# Altium PCB Voiture.PcbDoc (part 2 of 2)
Units mm, origin at the board's own origin, x right, y up, seen from the top; angles counter-clockwise.
Board outline 152.4 x 101.6 mm, 2 copper layers (Top Layer, Bottom Layer); 202 components, 170 nets, 599 pads, 88 vias.
Unrouted connection lines stored in the file: 12.
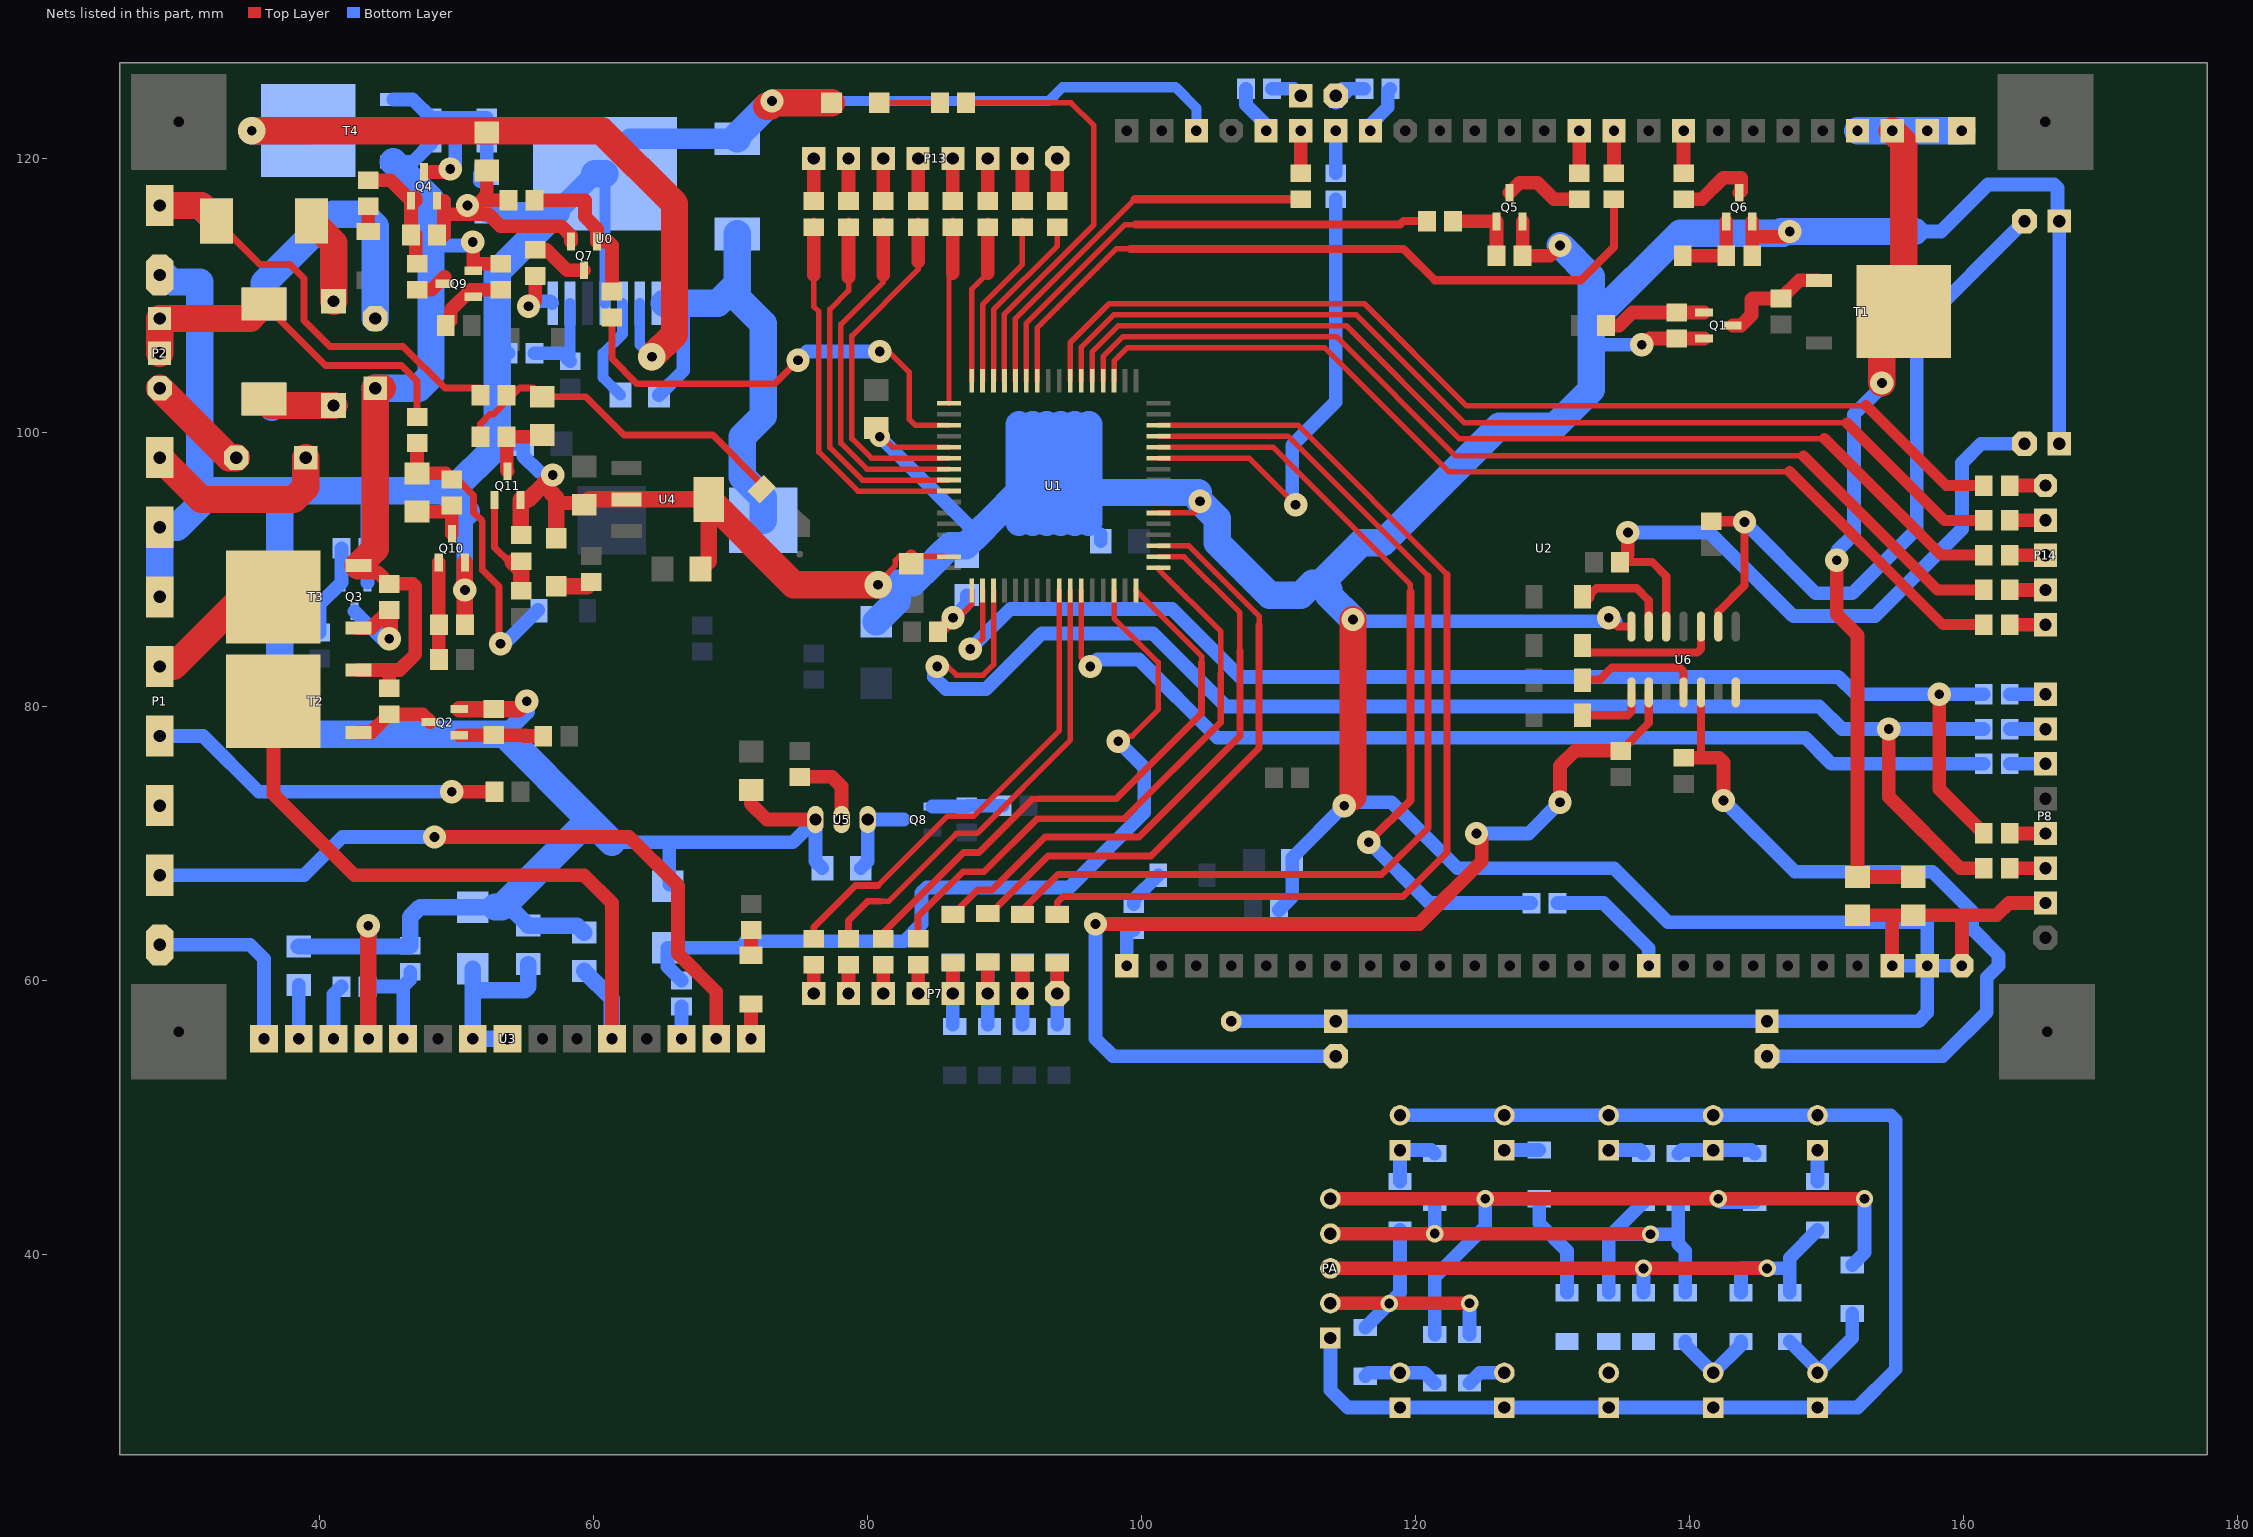
[diagram p2: the nets of this part, all layers, seen from the top]

## Via types
v1: diameter 1.7, hole 0.711, Top Layer to Bottom Layer, 74 vias
v2: diameter 1.27, hole 0.711, Top Layer to Bottom Layer, 9 vias
v3: diameter 2, hole 0.711, Top Layer to Bottom Layer, 4 vias
v4: diameter 1.5, hole 0.711, Top Layer to Bottom Layer, 1 vias

## Nets (pads, with @x,y where several pads share a name; then routed paths per layer and width w, separated by ;. In a path a pad name is that pad's centre, name@x,y a point inside that pad or via, vN(x,y) a via of type N, cw(c..) or ccw(c..) an arc to the next point about the centre after c; other vN are vias at no path point) (continued)
GND: C1.1 C3.1 C4.1 C5.1 C6.1 C7.1 C8.1 C9.1 C10.1 C11.2 C12.1 C13.2 C14.1 C17.1 C18.1 C19.1 C20.1 D5.1 D6.2 D8.1 D9.1 D10.1 D14.2 JJ0.2 JJ1.2 JJ2.2 JJ3.2 JJ4.2 JJ5.1 JJ6.1 JJ7.1 JJ8.1 JJ9.1 P1.3 P1.6 P1.7 P3.1 P4.2 P5.2 P6.2 P8.2 P12.2 PA.1 pad.1 Q1.2 Q2.2 Q3.2 Q4.2 Q5.2 Q6.2 Q7.2 Q10.2 Q11.2 R17.1 R19.1 R21.1 R24.2 R27.2 R33.2 R44.2 R51.1 R65.1 R81.2 R83.2 Reg1.2 U0.4 U0.8 U1.22 U1.53 U1.63 U2.2 U2.4 U2.6 U2.45 U3.4 U4.2 U4.4 U5.1 U6.7 | length 858.7
  Top Layer w0.4: v4(80.899,99.695) 81.061,99.695 81.817,98.939 U1.53@85.949,98.939 ; v3@81.153,89.408 82.042,90.297 82.042,90.678 82.333,90.969 83.185,90.969 85.588,90.969 U1.63@85.618,90.939 ; U1.22@101.249,94.139 103.854,94.139 104.076,94.361 104.14,94.361 104.267,94.488 v1(104.267,94.996) ; v1(134.112,86.487) 134.366,86.487 v1@134.639,86.214
  Top Layer w0.6: v1(134.112,86.487) 134.76,85.839 U6.7@135.763,85.839
  Top Layer w1: R65.1@49.083,114.427 49.083,115.951 ; 49.083,116.933 49.083,115.951 ; C1.1@52.197,119.123 52.197,117.348 51.816,116.967 ; R51.1@53.787,116.967 51.816,116.967 ; 56.331,96.209 56.325,96.203 56.897,95.63 ; 57.277,95.25 57.658,94.869 59.179,94.869 C4.1@59.309,94.739 ; Q7.2@58.359,113.953 58.359,114.361 57.658,115.062 53.213,115.062 52.324,115.951 v1@50.8,115.951 ; C19.1@71.501,73.911 71.501,72.898 72.644,71.755 U5.1@76.2,71.755 ; C8.1@83.185,90.427 C8.1@83.185,90.969 ; v1(114.808,72.771) 115.443,73.406 ; Q5.2@127.823,115.409 R19.1@127.823,112.903 129.794,112.903 v1(130.556,113.665) ; v1(136.525,106.426) 136.652,106.426 137.099,106.873 138.557,106.873 Q1.2@141.063,106.873 ; R17.1@144.587,112.903 144.587,114.3 ; Q6.2@144.587,115.409 144.587,114.3 ; v1(147.32,114.681) 146.939,114.3 144.587,114.3 ; C10.1@152.273,64.767 154.813,64.767 ; U2.6@154.813,61.087 154.813,64.767 ; U2.2@159.893,61.087 159.893,64.767 ; P8.2@165.989,65.659 163.322,65.659 162.43,64.767 159.893,64.767 ; 49.083,115.951 v1@50.8,115.951 ; v1@50.8,115.951 51.816,116.967 ; 154.813,64.767 C9.1@156.337,64.767 159.893,64.767
  Top Layer w1.2: U3.4@43.561,55.753 v1(43.561,64.008) ; Q2.2@50.199,79.817 R24.2@52.705,79.817 54.544,79.817 v1(55.118,80.391) ; R81.2@50.607,85.979 v1(50.607,88.519) Q10.2@50.607,90.517 ; R83.2@54.737,92.517 54.737,93.025 54.671,92.959 Q11.2@54.671,95.089 55.211,95.089 56.325,96.203 ; 56.331,96.209 v1(57.023,96.901) ; 56.897,95.63 57.277,95.25 D6.2@57.277,92.301 ; C4.1@59.693,95.123 U4.2@62.405,95.123 U4.4@68.405,95.123 68.405,90.627 C18.1@67.821,90.043
  Top Layer w2: U4.4@68.405,95.123 74.628,88.9 v3(80.772,88.9) ; v1@72.644,123.825 72.898,123.825 73.152,124.079 D14.2@77.371,124.079 ; 115.443,73.406 v1(115.443,86.36)
  Bottom Layer w0.4: v4(80.899,99.695) v4@81.026,99.695 ; 88.773,93.726 89.154,93.726 89.789,93.726 ; v1@134.62,86.233 v1@134.874,86.233
  Bottom Layer w0.75: v1(73.025,124.206) 93.218,124.206 94.234,125.222 102.489,125.222 104.013,123.698 U2.45@104.013,122.047
  Bottom Layer w0.8: U0.8@60.092,118.893 60.833,118.152 U0.4@60.833,109.443
  Bottom Layer w1: P1.3@28.321,72.771 P1.3@28.705,72.387 ; 43.434,95.758 43.495,95.697 R27.2@43.495,91.567 Q3.2@43.495,89.061 ; v1@50.8,115.951 52.073,115.951 C20.1@52.197,116.075 ; 52.959,99.06 53.086,99.187 C3.1@54.861,99.187 54.861,98.301 56.007,97.155 ; 52.959,105.918 53.086,105.791 Reg1.2@53.787,105.791 ; 61.341,70.104 65.532,70.104 ; D8.1@65.532,67.02 65.532,70.104 ; C17.1@76.705,68.199 76.2,68.704 U5.1@76.2,71.755 74.549,70.104 65.532,70.104 ; v4(80.899,99.695) 87.884,92.71 88.138,92.71 ; C6.1@97.025,92.075 C6.1@97.025,92.586 ; pad.1@106.553,57.023 P5.2@114.173,57.023 P6.2@145.669,57.023 156.718,57.023 157.353,57.658 U2.4@157.353,61.087 ; R44.2@110.043,65.151 111.001,66.109 C14.1@111.001,68.707 111.001,68.964 v1(114.808,72.771) 115.062,73.025 118.237,73.025 123.063,68.199 134.493,68.199 138.43,64.262 154.813,64.262 ; PA.1@113.792,33.909 113.792,30.099 115.062,28.829 JJ9.1@118.872,28.829 JJ8.1@126.492,28.829 JJ7.1@134.112,28.829 JJ6.1@141.732,28.829 JJ5.1@149.352,28.829 152.273,28.829 155.067,31.623 155.067,49.784 154.686,50.165 JJ4.2@149.352,50.165 JJ3.2@141.732,50.165 JJ2.2@134.112,50.165 JJ1.2@126.492,50.165 JJ0.2@118.872,50.165 ; v1@115.57,86.233 v1@134.62,86.233 ; 132.842,106.426 v1(136.525,106.426) ; 156.464,114.681 158.369,114.681 161.798,118.11 166.624,118.11 166.878,117.856 166.878,115.57 P4.2@167.005,115.443 P12.2@167.005,99.187 ; U2.2@159.893,61.087 U2.4@157.353,61.087 ; 154.813,64.262 U2.6@154.813,61.087 U2.4@157.353,61.087 ; 154.813,64.262 157.353,64.262 U2.4@157.353,61.087
  Bottom Layer w1.2: 38.354,95.758 38.415,95.697 ; C12.1@38.481,62.487 43.561,62.487 ; v1(43.561,64.008) 43.561,62.487 ; 49.657,95.758 50.955,94.46 50.701,94.206 50.607,94.112 v1(50.607,88.519) ; 52.832,65.369 D9.1@51.181,65.369 47.335,65.369 46.609,64.643 R33.2@46.609,62.545 46.551,62.487 43.561,62.487 ; 53.304,65.369 53.887,65.369 C11.2@55.245,64.011 58.801,64.011 C13.2@59.309,63.503 ; 53.467,77.978 55.118,79.629 v1(55.118,80.391)
  Bottom Layer w1.5: C20.1@52.197,116.075 57.274,116.075 U0.8@60.092,118.893 ; U0.8@62.657,121.458 D5.1@70.485,121.458
  Bottom Layer w2: P1.6@28.321,88.011 P1.7@28.321,93.091 29.591,93.091 31.242,94.742 ; P3.1@28.321,111.506 28.702,111.506 29.21,110.998 31.242,110.998 31.242,94.742 ; 39.624,95.758 38.354,95.758 ; 49.657,95.758 52.959,99.06 52.959,105.918 52.959,111.76 U0.8@57.274,116.075 ; 50.701,94.206 49.149,95.758 43.434,95.758 38.354,95.758 ; 52.832,65.369 53.304,65.369 59.69,71.755 ; U0.8@60.092,118.893 U0.8@60.833,118.893 ; 61.341,70.104 59.69,71.755 ; D5.1@70.485,121.458 70.485,121.666 v1@72.644,123.825 ; D10.1@80.645,86.197 82.169,87.721 82.169,88.9 82.042,89.027 83.312,89.027 84.645,90.361 85.281,90.995 86.042,91.757 87.185,91.757 88.138,92.71 89.154,93.726 91.059,95.631 ; 91.059,93.472 91.059,95.631 ; 91.059,100.584 91.059,95.631 ; 91.44,96.012 91.059,95.631 ; 92.075,93.472 92.075,100.584 ; 93.091,93.472 93.091,100.584 ; 94.107,93.472 94.107,100.584 ; 95.123,93.472 95.123,100.584 ; 96.139,93.472 96.139,95.631 ; 96.139,100.584 96.139,95.631 ; v1@104.14,95.631 96.139,95.631 ; v1(104.267,94.996) 105.537,93.726 105.537,91.948 109.347,88.138 111.633,88.138 112.498,89.003 112.915,88.83 ; v1@115.57,86.233 v1(115.443,86.36) 113.665,88.138 113.665,88.519 112.915,88.83 ; v1(130.556,113.665) 132.842,111.379 132.842,108.077 ; 156.464,114.681 v1(147.32,114.681) 146.685,114.681 146.812,114.554 139.319,114.554 132.842,108.077 ; 31.242,94.742 32.258,95.758 38.354,95.758 ; 38.354,95.758 37.084,94.488 37.084,77.978 53.467,77.978 59.69,71.755 ; 112.915,88.83 116.033,91.948 117.602,91.948 126.111,100.457 130.175,100.457 132.842,103.124 132.842,106.426 132.842,108.077
  other v1: 50.8,116.586
LED_CONTROL_UTR2: D8.2 R32.1 U1.14 | length 63.1
  Top Layer w0.4: U1.14@97.999,88.489 97.999,86.442 101.219,83.222 101.219,79.756 99.314,77.851 98.679,77.851 v1(98.298,77.47)
  Bottom Layer w1: R32.1@66.421,60.005 65.405,61.021 D8.2@65.405,62.393 70.903,62.393 71.098,62.865 72.263,62.865 82.677,62.865 83.947,64.135 83.947,66.421 84.328,66.802 94.742,66.802 100.203,72.263 100.203,75.565 v1(98.298,77.47)
LED_STATUS_GSM: R38.2 U1.44 | length 29
  Top Layer w0.4: U1.44@90.799,103.789 90.799,108.325 99.507,117.033
  Top Layer w0.6: 99.507,117.033 R38.2@111.633,117.033
LED_UC: R54.2 U1.45 | length 31.4
  Top Layer w0.4: R54.2@87.183,124.079 94.869,124.079 96.52,122.428 96.52,115.177 89.999,108.656 U1.45@89.999,103.789
MISO_UC: R6.1 R9.1 U1.3 | length 106.5
  Top Layer w0.4: v1(85.09,82.931) 85.852,82.931 86.487,82.296 88.437,82.296 89.199,83.058 U1.3@89.199,88.489
  Top Layer w1: v1(154.559,78.359) 154.559,73.406 159.766,68.199 R9.1@161.483,68.199
  Bottom Layer w1: v1@84.836,82.931 84.836,82.169 85.725,81.28 88.646,81.28 92.71,85.344 100.838,85.344 106.172,80.01 149.479,80.01 151.13,78.359 v1(154.559,78.359) R6.1@161.483,78.359
MOSI_UC: R5.1 R8.1 U1.2 | length 96.2
  Top Layer w0.4: 88.265,84.836 88.399,84.97 U1.2@88.399,88.489 88.399,85.859
  Top Layer w1: v1(158.242,80.899) 158.242,73.98 R8.1@161.483,70.739
  Bottom Layer w1: v1(87.503,84.201) 90.424,87.122 102.235,87.122 107.188,82.169 150.876,82.169 152.146,80.899 v1(158.242,80.899) ; v1@158.877,80.899 v1(158.242,80.899) ; R5.1@161.483,80.899 v1(158.242,80.899)
NetC1_2: C1.2 T4.4 U0.2 | length 53.3
  Top Layer w2: v3(35.052,122.047) 60.579,122.047 65.913,116.713 65.913,107.188 v3(64.262,105.537)
  Bottom Layer w0.8: U0.2@63.373,109.443 63.373,106.426 v3(64.262,105.537)
  Bottom Layer w2: v3(35.052,122.047) T4.4@39.171,122.047
NetC2_1: C2.1 D5.2 L1.1 U0.1 | length 37.5
  Bottom Layer w1: C2.1@64.773,102.743 66.549,104.52 66.549,108.81 67.183,109.443
  Bottom Layer w2: 65.173,109.443 67.183,109.443 69.057,109.443 70.485,110.871 ; D5.2@70.485,114.508 70.485,110.871 ; L1.1@71.755,95.885 L1.1@72.39,95.25 ; L1.1@72.39,93.599 L1.1@72.39,95.25 ; 70.485,110.871 70.485,109.855 72.39,107.95 72.39,101.219 70.866,99.695 70.866,96.774 L1.1@72.39,95.25
NetC2_2: C2.2 U0.3 | length 7.8
  Bottom Layer w0.8: C2.2@61.973,102.743 60.706,104.01 60.706,105.797 62.103,107.194 U0.3@62.103,109.443
NetC5_2: C5.2 R4.1 U1.1 | length 6.4
  Top Layer w0.4: v1(86.233,86.487) 86.741,86.487 86.903,86.649 86.903,86.745 87.599,87.441 U1.1@87.599,88.489
  Top Layer w1: R4.1@85.151,85.471 85.217,85.471 v1(86.233,86.487)
  Bottom Layer w1: v1(86.233,86.487) 87.249,87.503 C5.2@87.249,88.135
NetC11_1: C11.1 D9.2 U3.7 U3.8 | length 13.5
  Bottom Layer w1.2: D9.2@51.181,60.869 51.181,59.309 ; U3.8@53.721,55.753 U3.7@51.181,55.753 51.181,59.309 ; C11.1@55.245,61.211 55.245,59.563 54.991,59.309 51.181,59.309
NetC12_2: C12.2 U3.2 | length 3.9
  Bottom Layer w1: U3.2@38.481,55.753 C12.2@38.481,59.687 C12.2@38.481,59.69
NetC15_1: C15.1 Q10.3 R11.2 | length 4.8
  Top Layer w1: C15.1@47.117,94.231 49.207,94.231 R11.2@49.657,94.681 Q10.3@49.657,92.617
NetC15_2: C15.2 D20.2 R10.2 R11.1 | length 22.5
  Top Layer w0.5: R11.1@49.657,96.581 50.076,96.581 51.247,95.41 51.247,94.168 51.879,93.536 51.879,89.98 53.086,88.773 v1@53.086,84.455
  Top Layer w1: R10.2@47.117,99.253 C15.2@47.117,97.031 49.207,97.031 R11.1@49.657,96.581
  Bottom Layer w1: v1(53.213,84.582) 53.467,84.582 D20.2@55.945,87.06
NetC16_1: C16.1 Q11.3 R13.2 | length 5.2
  Top Layer w1: Q11.3@53.721,97.189 53.655,97.255 R13.2@53.655,99.695 56.137,99.695 C16.1@56.261,99.819
NetC16_2: C16.2 D21.2 R12.2 R13.1 | length 25.3
  Top Layer w0.5: R13.1@51.755,100.203 51.755,100.647 52.451,101.343 52.702,101.343 54.61,103.251 55.629,103.251 C16.2@56.261,102.619 59.433,102.619 62.23,99.822 68.707,99.822 72.278,96.251 D21.2@72.278,95.87
NetC17_2: C17.2 Q8.3 U5.3 | length 6.4
  Bottom Layer w1: C17.2@79.505,68.199 80.01,68.704 U5.3@80.01,71.755 Q8.3@82.643,71.755
NetC20_2: C20.2 R67.1 | length 2.7
  Bottom Layer w1: C20.2@51.689,118.367 C20.2@51.689,118.875 ; C20.2@52.197,118.875 R67.1@52.197,121.097
NetD1_2: D1.2 D4.1 R1.1 | length 11.4
  Top Layer w2: D1.2@35.941,102.443 36.403,101.981 R1.1@41.021,101.981
  Bottom Layer w2: D4.1@36.53,101.854 D4.1@35.941,102.443 36.576,102.443 37.038,101.981 R1.1@41.021,101.981
NetD2_1: D2.1 R1.2 | length 6.5
  Top Layer w2: D2.1@39.416,115.443 41.021,113.838 R1.2@41.021,109.601
NetD3_2: D3.2 D4.2 P11.1 | length 18.8
  Bottom Layer w2: D4.2@35.941,109.393 35.941,110.917 40.975,115.951 43.18,115.951 44.069,115.062 P11.1@44.069,108.331
NetD6_1: D6.1 R2.1 | length 2.7
  Top Layer w1.2: D6.1@57.277,88.801 59.525,88.801 R2.1@59.817,89.093
NetD7_1: D7.1 R31.2 | length 1.8
  Top Layer w1: D7.1@71.501,61.846 R31.2@71.501,63.693
NetD7_2: D7.2 U3.15 | length 2.5
  Top Layer w1: U3.15@71.501,55.753 D7.2@71.501,58.296
NetD11_1: D11.1 R43.1 | length 2.8
  Bottom Layer w1: R43.1@99.441,65.593 99.441,65.91 D11.1@101.222,67.691
NetD12_2: D12.2 R64.1 | length 1.8
  Top Layer w1: D12.2@43.561,114.678 R64.1@43.561,116.525
NetD14_1: D14.1 R54.1 | length 4.4
  Top Layer w0.4: D14.1@80.871,124.079 R54.1@85.283,124.079
NetD15_2: D15.2 U6.3 | length 10.6
  Top Layer w0.6: D15.2@132.204,84.455 132.712,83.947 140.589,83.947 140.843,84.201 U6.3@140.843,85.839
NetD16_2: D16.2 U6.6 | length 7.4
  Top Layer w0.6: D16.2@132.588,88.011 133.223,88.646 136.144,88.646 137.033,87.757 U6.6@137.033,85.839
  Top Layer w1: D16.2@132.204,88.011 D16.2@132.588,88.011
NetD17_2: D17.2 U6.8 | length 5.1
  Top Layer w0.6: D17.2@132.204,79.375 135.509,79.375 135.763,79.629 U6.8@135.763,81.039
NetD18_2: D18.2 U6.11 | length 9.4
  Top Layer w0.6: D18.2@132.204,81.915 132.274,81.985 133.477,81.985 134.331,82.839 139.284,82.839 139.573,82.55 U6.11@139.573,81.039
NetDD0_2: DD0.2 DD2.2 JJ0.1 | length 4.9
  Bottom Layer w1: DD0.2@118.872,45.336 JJ0.1@118.872,47.625 121.155,47.625 DD2.2@121.412,47.368
NetDD13_2: DD13.2 JJ1.1 | length 2.5
  Bottom Layer w1: JJ1.1@126.492,47.625 DD13.2@129.032,47.625
NetDD22_2: DD22.2 JJ2.1 | length 2.6
  Bottom Layer w1: JJ2.1@134.112,47.625 136.395,47.625 DD22.2@136.652,47.368
NetDD32_2: DD32.2 DD33.2 JJ3.1 | length 5.8
  Bottom Layer w1: DD32.2@139.192,47.368 139.449,47.625 JJ3.1@141.732,47.625 144.523,47.625 DD33.2@144.78,47.368
NetDD41_2: DD41.2 JJ4.1 | length 2.3
  Bottom Layer w1: DD41.2@149.352,45.336 JJ4.1@149.352,47.625
NetDD51_2: DD51.2 DD53.2 JJ5.2 | length 8.5
  Bottom Layer w1: DD51.2@147.32,33.658 149.352,31.626 JJ5.2@149.352,31.369 151.892,33.909 DD53.2@151.892,35.69
NetDD61_2: DD61.2 DD62.2 JJ6.2 | length 6.3
  Bottom Layer w1: DD62.2@139.7,33.658 139.7,33.401 JJ6.2@141.732,31.369 143.764,33.401 DD61.2@143.764,33.658
NetDD71_2: DD71.2 DD72.2 DD73.2 JJ7.2
NetDD80_2: DD80.2 JJ8.2 | length 2.9
  Bottom Layer w1: DD80.2@123.952,30.61 124.711,31.369 JJ8.2@126.492,31.369
NetDD90_2: DD90.2 DD93.2 JJ9.2 | length 5.5
  Bottom Layer w1: DD90.2@116.332,31.118 116.583,31.369 JJ9.2@118.872,31.369 120.653,31.369 DD93.2@121.412,30.61
NetP1_4: P1.4 R40.2 | length 26.1
  Top Layer w1: v1(49.657,73.787) R40.2@52.771,73.787
  Bottom Layer w1: P1.4@28.321,77.851 31.496,77.851 35.56,73.787 39.37,73.787 v1(49.657,73.787)
NetP1_8: P1.8 P10.2 | length 14.5
  Top Layer w2: P1.8@28.321,98.171 31.369,95.123 38.1,95.123 38.989,96.012 P10.2@38.989,98.171
NetP2_1: P2.1 P10.1 | length 7.7
  Top Layer w2: P2.1@28.321,103.251 33.401,98.171 P10.1@33.909,98.171
NetP7_5: P7.5 R59.2 | length 2.1
  Top Layer w1: P7.5@83.693,59.055 R59.2@83.693,61.153
NetP7_6: P7.6 R60.2 | length 2.1
  Top Layer w1: P7.6@81.153,59.055 R60.2@81.153,61.153
NetP7_7: P7.7 R61.2 | length 2.1
  Top Layer w1: P7.7@78.613,59.055 R61.2@78.613,61.153
NetP7_8: P7.8 R62.2 | length 2.1
  Top Layer w1: P7.8@76.073,59.055 R62.2@76.073,61.153
NetP8_3: P8.3 R9.2 | length 2.6
  Top Layer w1: R9.2@163.383,68.199 P8.3@165.989,68.199
NetP8_4: P8.4 R8.2 | length 2.6
  Top Layer w1: R8.2@163.383,70.739 P8.4@165.989,70.739
NetP8_6: P8.6 R7.2 | length 2.6
  Bottom Layer w1: R7.2@163.383,75.819 P8.6@165.989,75.819
NetP8_7: P8.7 R6.2 | length 2.6
  Bottom Layer w1: R6.2@163.383,78.359 P8.7@165.989,78.359
NetP8_8: P8.8 R5.2 | length 2.6
  Bottom Layer w1: R5.2@163.383,80.899 P8.8@165.989,80.899
NetP13_1: P13.1 R72.2 | length 3.1
  Top Layer w1: R72.2@93.853,116.901 P13.1@93.853,120.015
NetP13_2: P13.2 R73.2 | length 3.1
  Top Layer w1: R73.2@91.313,116.901 P13.2@91.313,120.015
NetP13_3: P13.3 R74.2 | length 3.1
  Top Layer w1: R74.2@88.773,116.901 P13.3@88.773,120.015
NetP13_4: P13.4 R75.2 | length 3.1
  Top Layer w1: R75.2@86.233,116.901 P13.4@86.233,120.015
NetP13_5: P13.5 R76.2 | length 3.1
  Top Layer w1: R76.2@83.693,116.901 P13.5@83.693,120.015
NetP13_6: P13.6 R77.2 | length 3.1
  Top Layer w1: R77.2@81.153,116.901 P13.6@81.153,120.015
NetP13_7: P13.7 R78.2 | length 3.1
  Top Layer w1: R78.2@78.613,116.901 P13.7@78.613,120.015
NetP13_8: P13.8 R79.2 | length 3.1
  Top Layer w1: R79.2@76.073,116.901 P13.8@76.073,120.015
NetP14_1: P14.1 R88.2 | length 2.6
  Top Layer w1: R88.2@163.383,96.139 P14.1@165.989,96.139
NetP14_2: P14.2 R87.2 | length 2.6
  Top Layer w1: R87.2@163.383,93.599 P14.2@165.989,93.599
NetP14_3: P14.3 R86.2 | length 2.6
  Top Layer w1: R86.2@163.383,91.059 P14.3@165.989,91.059
NetP14_4: P14.4 R85.2 | length 2.6
  Top Layer w1: R85.2@163.383,88.519 P14.4@165.989,88.519
NetP14_5: P14.5 R84.2 | length 2.6
  Top Layer w1: R84.2@163.383,85.979 P14.5@165.989,85.979
NetQ1_1: Q1.1 R20.1 R21.2 | length 7.5
  Top Layer w1: R20.1@133.919,107.823 134.874,107.823 135.824,108.773 138.557,108.773 Q1.1@141.063,108.773
NetQ1_3: Q1.3 R22.2 T1.1 | length 8.3
  Top Layer w1: Q1.3@143.163,107.823 143.764,107.823 144.526,108.585 144.526,109.728 144.587,109.789 R22.2@146.685,109.789 148.015,111.119 T1.1@149.447,111.119
NetQ2_1: Q2.1 R23.1 R24.1 | length 6.3
  Top Layer w1: Q2.1@50.199,77.917 R24.1@52.705,77.917 55.057,77.917 54.991,77.851 R23.1@56.327,77.851
NetQ2_3: Q2.3 R25.2 T2.1 | length 6.1
  Top Layer w1: T2.1@42.831,78.111 43.755,78.111 R25.2@45.085,79.441 47.525,79.441 Q2.3@48.099,78.867
NetQ3_1: Q3.1 R26.1 R27.1 | length 6.8
  Bottom Layer w1: R26.1@40.005,85.405 40.005,87.471 Q3.1@41.595,89.061 R27.1@41.595,91.567
NetQ3_3: Q3.3 R28.2 T3.1 | length 10.6
  Top Layer w1: T3.1@42.831,85.731 43.755,85.731 R28.2@45.085,87.061 ; v1(45.085,84.963) R28.2@45.085,87.061 ; v1@45.212,85.471 45.212,86.934 R28.2@45.085,87.061
  Bottom Layer w1: Q3.3@42.545,86.961 44.543,84.963 v1(45.085,84.963) v1@44.577,85.471
NetQ4_1: Q4.1 R49.1 R64.2 R65.2 | length 8.7
  Top Layer w1: R64.2@43.561,118.425 45.183,118.425 Q4.1@46.675,116.933 R65.2@46.675,114.427 ; Q4.1@46.929,117.187 47.025,117.091 47.025,116.933 ; R65.2@47.025,114.427 47.025,112.421 R49.1@47.117,112.329
NetQ4_3: Q4.3 R47.2 R67.2 T4.1 | length 13.5
  Top Layer w1: 48.133,119.033 49.056,119.033 v1@49.276,119.253
  Bottom Layer w1: T4.1@45.371,124.327 46.803,124.327 R47.2@48.133,122.997 49.911,122.997 ; v1@49.276,119.253 v1(49.53,119.253) 49.911,119.634 49.911,122.997 ; 51.181,122.997 50.419,122.997 ; R67.2@52.197,122.997 50.419,122.997 ; 49.911,122.997 50.419,122.997
NetQ5_1: Q5.1 R18.1 R19.2 | length 5.7
  Top Layer w1: R18.1@122.743,115.443 125.889,115.443 Q5.1@125.923,115.409 R19.2@125.923,112.903
NetQ6_1: Q6.1 R16.1 R17.2 | length 5.7
  Top Layer w1: R16.1@139.507,112.903 R17.2@142.687,112.903 Q6.1@142.687,115.409
NetQ7_1: Q7.1 R46.1 R51.2 | length 11.6
  Top Layer w1: R51.2@55.687,116.967 59.375,116.967 59.375,115.758 60.259,114.874 Q7.1@60.259,113.953 61.053,113.953 61.341,113.665 R46.1@61.341,110.297
NetQ7_3: Q7.3 R45.1 | length 4.2
  Top Layer w1: R45.1@55.753,113.345 56.581,113.345 58.073,111.853 Q7.3@59.309,111.853
NetQ8_1: Q8.1 R52.1 R53.2 | length 5.1
  Bottom Layer w1: Q8.1@84.743,72.705 R52.1@87.249,72.705 87.315,72.771 R53.2@89.855,72.771
NetQ9_1: Q9.1 R48.2 R50.1 | length 5.5
  Top Layer w1: R50.1@49.215,107.823 49.565,108.173 49.565,108.946 51.048,110.429 51.215,110.429 R48.2@53.213,110.429
NetQ9_3: Q9.3 R49.2 | length 2.4
  Top Layer w1: R49.2@47.117,110.429 48.165,110.429 49.115,111.379
NetQ10_1: Q10.1 R80.1 R81.1 | length 7.6
  Top Layer w1: R80.1@48.707,83.439 R81.1@48.707,85.979 ; R81.1@48.707,85.471 R81.1@48.707,85.979 ; Q10.1@48.707,90.517 R81.1@48.707,85.979
NetQ11_1: Q11.1 R82.1 R83.1 | length 7.6
  Top Layer w0.5: Q11.1@52.771,95.089 52.779,95.081 52.779,91.62 53.848,90.551 R83.1@54.102,90.551
  Top Layer w1.2: R83.1@54.102,90.551 54.737,89.916 R82.1@54.737,88.453
NetR29_1: R29.1 U1.28 | length 56.3
  Top Layer w0.4: U1.28@101.249,98.939 109.595,98.939 119.634,88.9 119.634,88.392
  Top Layer w0.6: v1(116.586,70.104) 119.634,73.152 119.634,88.392
  Bottom Layer w1: v1(116.586,70.104) 121.031,65.659 R29.1@128.463,65.659
NetR30_1: R30.1 U1.27 | length 35.1
  Top Layer w0.4: U1.27@101.249,98.139 107.855,98.139 v1(111.252,94.742)
  Bottom Layer w1: v1(111.252,94.742) 110.998,94.996 110.998,99.06 114.173,102.235 R30.1@114.173,117.033
NetR32_2: R32.2 U3.13 | length 2.4
  Bottom Layer w1: U3.13@66.421,55.753 R32.2@66.421,58.105
NetR33_1: R33.1 R34.1 U3.5 | length 7.7
  Bottom Layer w1: R34.1@43.495,59.563 46.101,59.563 ; U3.5@46.101,55.753 46.101,59.563 ; R33.1@46.609,60.645 46.609,60.071 46.101,59.563
NetR34_2: R34.2 U3.3 | length 4
  Bottom Layer w1: U3.3@41.021,55.753 41.021,58.989 R34.2@41.595,59.563
NetR36_1: R36.1 U2.17 | length 3.1
  Top Layer w1: R36.1@139.573,118.933 U2.17@139.573,122.047
NetR37_1: R37.1 U2.23 | length 3.1
  Top Layer w1: R37.1@131.953,118.933 U2.23@131.953,122.047
NetR38_1: R38.1 U2.39 | length 3.1
  Top Layer w1: R38.1@111.633,118.933 U2.39@111.633,122.047
NetR39_1: R39.1 U2.21 | length 3.1
  Top Layer w1: R39.1@134.493,118.933 U2.21@134.493,122.047
NetR41_1: R41.1 U2.41 | length 3.7
  Bottom Layer w1: R41.1@107.635,125.095 107.635,123.938 109.093,122.48 U2.41@109.093,122.047
NetR42_1: R42.1 U2.35 | length 3.7
  Bottom Layer w1: U2.35@116.713,122.047 116.713,122.48 117.983,123.75 117.983,124.907 R42.1@118.171,125.095
NetR43_2: R43.2 U2.50 | length 3.1
  Bottom Layer w1: U2.50@98.933,61.087 98.933,63.693 R43.2@99.441,63.693
NetR45_2: R45.2 U0.7 | length 3.1
  Top Layer w1: v1@55.753,109.601 R45.2@55.753,111.445
  Bottom Layer w1: v1@55.753,109.601 56.835,109.601 U0.7@56.993,109.443
  other v1: 55.245,109.22
NetR63_1: R63.1 U5.2 | length 5.8
  Top Layer w1: R63.1@75.057,74.869 77.404,74.869 78.105,74.168 U5.2@78.105,71.755
NetReg1_1: Reg1.1 Reg2.2 U0.6 | length 7.1
  Bottom Layer w0.8: Reg2.2@58.293,105.217 U0.6@58.293,109.443
  Bottom Layer w1: Reg1.1@55.687,105.791 57.719,105.791 Reg2.2@58.293,105.217
NIV0: P4.1 R68.1 U6.2 | length 52.2
  Top Layer w0.6: U6.2@142.113,86.925 144.018,88.83 v1(144.018,93.472) v1@143.957,93.533
  Top Layer w0.8: R68.1@141.605,93.533 v1@143.957,93.533
  Bottom Layer w1: v1(144.018,93.472) 149.225,88.265 151.892,88.265 156.591,92.964 156.591,107.569 P4.1@164.465,115.443
NIV1: P5.1 R69.1 U6.9 | length 80.7
  Top Layer w0.4: R69.1@135.001,76.769 136.621,78.39
  Top Layer w0.6: R69.1@135.001,76.769 137.033,78.801 U6.9@137.033,81.039
  Top Layer w1: v1(96.647,64.135) 120.269,64.135 124.841,68.707 124.841,70.358 v1(124.46,70.739) ; v1(130.556,73.025) 130.556,75.692 131.633,76.769 R69.1@135.001,76.769
  Bottom Layer w1: v1(96.647,64.135) 96.647,55.753 97.917,54.483 P5.1@114.173,54.483 ; v1(124.46,70.739) 128.27,70.739 v1(130.556,73.025)
NIV2: P6.1 R70.1 U6.12 | length 58
  Top Layer w0.6: 140.843,76.261 U6.12@140.843,81.039
  Top Layer w1: R70.1@139.573,76.261 140.843,76.261 142.179,76.261 142.494,75.946 v1(142.494,73.152)
  Bottom Layer w1: v1(142.494,73.152) 147.701,67.945 157.734,67.945 160.655,65.024 160.655,63.754 162.56,61.849 162.56,61.087 161.716,60.243 161.716,57.703 158.496,54.483 P6.1@145.669,54.483
NIV3: P12.1 R71.1 U6.5 | length 49.4
  Top Layer w0.6: R71.1@134.935,90.551 137.287,90.551 138.303,89.535 U6.5@138.303,85.839
  Top Layer w1: R71.1@134.935,90.551 135.509,91.125 v1(135.509,92.71)
  Bottom Layer w1: v1(135.509,92.71) 141.478,92.71 147.574,86.614 153.543,86.614 159.893,92.964 159.893,97.79 161.29,99.187 P12.1@164.465,99.187
ONOFF_GSM: Q6.3 R36.2 | length 6
  Top Layer w1: R36.2@139.573,117.033 140.904,117.033 142.489,118.618 143.764,118.618 143.764,117.636 Q6.3@143.637,117.509
PWRMON_GSM: R39.2 U1.42 | length 53.8
  Top Layer w0.4: U1.42@92.399,103.789 92.399,107.662 98.148,113.411 99.187,113.411
  Top Layer w0.6: 99.187,113.411 119.126,113.411 121.412,111.125 132.08,111.125 134.493,113.538 R39.2@134.493,117.033
RESET_ALL: R46.2 U1.51 | length 33.6
  Top Layer w0.4: v1(80.899,105.918) 81.534,105.918 83.058,104.394 83.058,100.971 83.49,100.539 U1.51@85.949,100.539
  Top Layer w0.5: R46.2@61.341,108.397 61.341,105.41 63.182,103.569 73.215,103.569 v1(74.93,105.283)
  Bottom Layer w1: v1(74.93,105.283) 75.565,105.918 v1(80.899,105.918)
RESET_GSM: R18.2 U1.43 | length 36.5
  Top Layer w0.4: U1.43@91.599,103.789 91.599,107.994 98.794,115.189 99.568,115.189
  Top Layer w0.6: 99.568,115.189 118.872,115.189 119.126,115.443 R18.2@120.843,115.443
RESET_MODULE_GSM: Q5.3 R37.2 | length 5.9
  Top Layer w1: Q5.3@126.873,117.509 127.601,118.237 128.905,118.237 130.109,117.033 R37.2@131.953,117.033
RX_GPS: P9.2 R41.2 | length 2.3
  Bottom Layer w1: R41.2@109.535,125.095 111.125,125.095 P9.2@111.633,124.587
RX_GSM: R30.2 U2.37 | length 3.1
  Bottom Layer w1: R30.2@114.173,118.933 U2.37@114.173,122.047
RXCAP_UTR2: P1.1 U3.1 | length 13.9
  Bottom Layer w1: P1.1@28.321,62.611 34.925,62.611 35.941,61.595 U3.1@35.941,55.753
S1: D22.2 D26.2 D30.2 DD13.1 DD33.1 DD53.1 DD73.1 DD93.1 P7.1 PA.5 | length 77.2
  Top Layer w1: P7.1@93.853,59.055 D22.2@93.853,61.278 ; PA.5@113.792,44.069 v2(125.095,44.069) v2(142.113,44.069) v2(152.781,44.069)
  Bottom Layer w1: D30.2@93.853,56.766 P7.1@93.853,59.055 D26.2@93.853,61.344 ; DD93.1@121.412,34.16 121.412,38.354 125.095,42.037 v2(125.095,44.069) 127.251,44.069 ; 127.257,44.075 DD13.1@129.032,44.075 129.032,42.288 131.064,40.256 DD73.1@131.064,37.208 ; v2@142.491,44.069 v2(142.113,44.069) 142.364,43.818 DD33.1@144.78,43.818 ; DD53.1@151.892,39.24 152.781,40.129 v2(152.781,44.069)
S2: D23.2 D27.2 D31.2 DD2.1 DD22.1 DD32.1 DD62.1 DD72.1 P7.2 PA.4 | length 54.6
  Top Layer w1: P7.2@91.313,59.055 D23.2@91.313,61.278 ; PA.4@113.792,41.529 v2(121.412,41.529) v2@137.16,41.529
  Bottom Layer w1: D31.2@91.313,56.766 P7.2@91.313,59.055 D27.2@91.313,61.344 ; v2(121.412,41.529) DD2.1@121.412,43.818 ; DD72.1@134.112,37.208 134.112,41.278 134.319,41.485 ; DD22.1@136.652,43.818 134.319,41.485 ; v2(137.16,41.485) 134.319,41.485 ; 139.148,41.485 134.319,41.485 ; DD32.1@139.192,43.818 139.192,40.767 139.7,40.259 DD62.1@139.7,37.208
S3: D24.2 D28.2 D32.2 DD41.1 DD51.1 DD61.1 DD71.1 P7.3 PA.3 | length 51.3
  Top Layer w1: P7.3@88.773,59.055 D24.2@88.773,61.344 ; PA.3@113.792,38.989 v2(136.652,38.989) 143.764,38.989 v2(145.669,38.989)
  Bottom Layer w1: D32.2@88.773,56.766 P7.3@88.773,59.055 D28.2@88.773,61.344 ; DD71.1@136.652,37.208 v2(136.652,38.989) ; DD61.1@143.764,37.208 143.764,38.989 147.32,38.989 ; DD51.1@147.32,37.208 147.32,38.989 ; DD41.1@149.352,41.786 147.32,39.754 147.32,38.989
S4: D25.2 D29.2 D33.2 DD0.1 DD80.1 DD90.1 P7.4 PA.2 | length 27.4
  Top Layer w1: P7.4@86.233,59.055 D25.2@86.233,61.278 ; PA.2@113.792,36.449 v2(123.952,36.449)
  Bottom Layer w1: D33.2@86.233,56.766 P7.4@86.233,59.055 D29.2@86.233,61.344 ; DD90.1@116.332,34.668 118.872,37.208 DD0.1@118.872,41.786 ; DD80.1@123.952,34.16 v2(123.952,36.449)
  other v2: 118.087,36.423
SCK_UC: R7.1 U1.11 | length 74.4
  Top Layer w0.4: U1.11@95.599,88.489 95.599,83.598 v1(96.266,82.931)
  Bottom Layer w1: v1(96.266,82.931) 96.774,83.439 99.822,83.439 105.537,77.724 148.463,77.724 150.368,75.819 R7.1@161.483,75.819
SPARE1: D22.1 U1.30 | length 76.7
  Top Layer w0.4: U1.30@101.249,100.539 103.02,100.539 103.026,100.545 111.418,100.545 122.301,89.662
  Top Layer w0.5: D22.1@93.853,64.828 93.853,65.72 94.267,66.134 119.093,66.134 122.301,69.342 122.301,89.662
SPARE2: D23.1 U1.29 | length 74.7
  Top Layer w0.4: U1.29@101.249,99.739 110.7,99.739 120.904,89.535
  Top Layer w0.5: D23.1@91.313,64.828 91.313,65.151 93.916,67.754 117.538,67.754 120.904,71.12 120.904,89.535
SPARE3: D24.1 U1.19 | length 43.9
  Top Layer w0.4: U1.19@101.249,91.739 103.46,91.739 108.585,86.614 108.585,85.979
  Top Layer w0.5: D24.1@88.773,64.894 88.985,64.894 93.179,69.088 100.711,69.088 108.585,76.962 108.585,85.979
SPARE4: D25.1 U1.18 | length 43
  Top Layer w0.4: U1.18@101.249,90.939 103.117,90.939 107.188,86.868 107.188,84.074
  Top Layer w0.5: D25.1@86.233,64.828 88.016,66.611 89.09,66.611 92.964,70.485 99.822,70.485 107.188,77.851 107.188,84.074
SPARE5: R59.1 U1.17 | length 42.8
  Top Layer w0.4: U1.17@101.249,90.139 101.249,90.013 105.791,85.471 105.791,82.423
  Top Layer w0.5: R59.1@83.693,63.053 83.693,64.682 86.956,67.945 88.519,67.945 92.392,71.819 98.742,71.819 105.791,78.867 105.791,82.423
SPARE6: R60.1 U1.16 | length 41.3
  Top Layer w0.4: U1.16@99.599,88.489 104.394,83.694 104.394,83.222
  Top Layer w0.5: R60.1@81.153,63.053 81.153,63.5 86.995,69.342 88.138,69.342 92.075,73.279 98.171,73.279 104.394,79.502 104.394,83.222
SPARE7: R61.1 U1.10 | length 33.9
  Top Layer w0.4: 80.899,65.786 81.534,65.786 86.487,70.739 88.011,70.739 94.799,77.527 U1.10@94.799,88.489
  Top Layer w0.5: R61.1@78.613,63.053 78.613,64.389 80.01,65.786 80.899,65.786
SPARE8: R62.1 U1.9 | length 34.9
  Top Layer w0.4: 80.772,66.929 85.852,72.009 87.757,72.009 93.999,78.251 U1.9@93.999,88.489
  Top Layer w0.5: R62.1@76.073,63.053 76.073,63.881 79.121,66.929 80.772,66.929
SPARE9: R72.1 U1.46 | length 13.1
  Top Layer w0.4: U1.46@89.199,103.789 89.199,108.988 93.853,113.642 R72.1@93.853,115.001
SPARE10: R73.1 U1.47 | length 12.9
  Top Layer w0.4: U1.47@88.399,103.789 88.399,109.354 91.313,112.268 R73.1@91.313,115.001 R73.1@91.313,115.509
SPARE11: R74.1 U1.48 | length 12.2
  Top Layer w0.4: U1.48@87.599,103.789 87.592,103.796 87.592,110.452 88.773,111.633 ; R74.1@88.773,115.001 R74.1@88.773,115.509
  Top Layer w1: 88.773,111.633 R74.1@88.773,115.001
SPARE12: R75.1 U1.49 | length 13.5
  Top Layer w0.4: U1.49@85.949,102.139 85.949,111.349 86.233,111.633 ; R75.1@86.233,115.001 R75.1@86.233,115.509
  Top Layer w1: 86.233,111.633 R75.1@86.233,115.001
SPARE13: R76.1 U1.54 | length 25.1
  Top Layer w0.4: 83.693,111.912 78.853,107.072 78.853,99.57 80.284,98.139 U1.54@85.949,98.139 ; R76.1@83.693,115.001 R76.1@83.693,115.509
  Top Layer w1: 83.693,112.49 R76.1@83.693,115.001
SPARE14: R77.1 U1.55 | length 26.2
  Top Layer w0.4: 81.153,111.506 81.153,110.998 78.053,107.898 78.053,99.239 79.953,97.339 U1.55@85.949,97.339 ; R77.1@81.153,115.001 R77.1@81.153,115.509
  Top Layer w1: 81.153,111.506 R77.1@81.153,115.001
SPARE15: R78.1 U1.56 | length 26.8
  Top Layer w0.4: 78.613,111.356 78.613,110.363 77.253,109.003 77.253,98.908 79.622,96.539 U1.56@85.949,96.539 ; R78.1@78.613,115.001 R78.1@78.613,115.509
  Top Layer w1: 78.613,111.356 R78.1@78.613,115.001
SPARE16: R79.1 U1.57 | length 27.8
  Top Layer w0.4: 76.073,111.506 76.073,109.22 76.453,108.84 76.453,98.576 79.29,95.739 U1.57@85.949,95.739 ; R79.1@76.073,115.001 R79.1@76.073,115.509
  Top Layer w1: 76.073,111.506 R79.1@76.073,115.001
SPARE17: R84.1 U1.35 | length 73.7
  Top Layer w0.4: U1.35@97.999,103.789 97.999,105.238 98.971,106.21 113.373,106.21 122.428,97.155 147.32,97.155
  Top Layer w0.8: 147.32,97.155 158.496,85.979 R84.1@161.483,85.979
SPARE18: R85.1 U1.36 | length 74.3
  Top Layer w0.4: U1.36@97.199,103.789 97.199,105.569 98.64,107.01 114.224,107.01 122.936,98.298 148.336,98.298
  Top Layer w0.8: 148.336,98.298 158.115,88.519 R85.1@161.483,88.519
SPARE19: R86.1 U1.37 | length 74.9
  Top Layer w0.4: U1.37@96.399,103.789 96.399,105.901 98.308,107.81 114.948,107.81 123.19,99.568 149.86,99.568
  Top Layer w0.8: 149.86,99.568 158.369,91.059 R86.1@161.483,91.059
SPARE20: R87.1 U1.38 | length 75.5
  Top Layer w0.4: U1.38@95.599,103.789 95.599,106.232 97.977,108.61 115.672,108.61 123.571,100.711 151.511,100.711
  Top Layer w0.8: 151.511,100.711 158.623,93.599 R87.1@161.483,93.599
SPARE21: R88.1 U1.39 | length 76.1
  Top Layer w0.4: U1.39@94.799,103.789 94.799,106.563 97.646,109.41 116.269,109.41 123.698,101.981 152.908,101.981
  Top Layer w0.8: 152.908,101.981 158.75,96.139 R88.1@161.483,96.139
TX_GPS: P9.1 R42.2 | length 3.7
  Bottom Layer w1: P9.1@114.173,124.079 115.123,125.029 ; P9.1@114.173,124.587 114.681,125.095 R42.2@116.271,125.095
TX_GSM: R29.2 U2.20 | length 9.3
  Bottom Layer w1: R29.2@130.363,65.659 133.731,65.659 137.033,62.357 U2.20@137.033,61.087
TXCAP_UTR2: P1.2 U3.14 | length 52.8
  Top Layer w1: v1(48.387,70.485) 62.611,70.485 66.167,66.929 66.167,61.976 68.961,59.182 U3.14@68.961,55.753
  Bottom Layer w1: P1.2@28.321,67.691 38.862,67.691 41.656,70.485 v1(48.387,70.485)
VCC: U6.14
VCC_BATT: P11.2 Q9.2 R25.1 R28.1 R47.1 R48.1 T2.3 T3.3 T4.3 | length 60.8
  Top Layer w1: T2.3@42.831,82.671 44.704,82.671 ; T3.3@42.831,90.291 43.333,89.789 44.257,89.789 R28.1@45.085,88.961 46.802,88.961 46.99,88.773 46.99,83.82 45.841,82.671 44.704,82.671 ; R25.1@45.085,81.341 45.085,82.29 44.704,82.671 ; v1@51.181,113.665 51.215,113.631 51.215,112.329 R48.1@53.213,112.329
  Top Layer w2: T3.3@42.831,90.291 44.069,91.529 P11.2@44.069,103.251 P11.2@44.577,103.251
  Bottom Layer w1: T4.3@45.371,119.767 46.803,119.767 R47.1@48.133,121.097 ; 48.133,113.665 v1@51.181,113.665
  Bottom Layer w2: P11.2@44.069,103.251 47.244,103.251 48.133,104.14 48.133,113.665 48.133,117.005 T4.3@45.371,119.767
  other v1: 51.181,113.919
VCC_BATT_SECOUR: D2.2 D3.1 P3.2 R12.1 | length 38.2
  Top Layer w0.5: D2.2@32.466,115.443 35.641,112.268 37.846,112.268 38.862,111.252 38.862,108.204 40.767,106.299 46.101,106.299 49.149,103.251 R12.1@51.755,103.251
  Top Layer w2: P3.2@28.321,116.586 P3.2@28.736,116.586 ; P3.2@28.321,116.713 28.357,116.702 P3.2@28.736,116.586 ; D2.2@32.466,115.443 31.323,116.586 P3.2@28.736,116.586
  Bottom Layer w2: P3.2@28.321,116.713 28.38,116.625 P3.2@28.406,116.586 ; P3.2@28.406,116.586 28.575,116.332 P3.2@28.321,116.586 P3.2@28.406,116.586 ; P3.2@28.406,116.586 31.323,116.586 D3.1@31.912,115.997 ; D3.1@31.912,115.997 32.466,115.997 D3.1@32.466,115.951 ; D3.1@31.912,115.997 D3.1@31.958,115.951 ; D3.1@31.958,115.951 D3.1@32.466,115.951 ; D3.1@31.958,115.951 D3.1@32.466,115.443 D3.1@32.466,115.951
VCC_GSM: C9.2 C10.2 T1.4 U2.1 U2.3 U2.5 U2.7 | length 69.2
  Top Layer w1: v1(150.749,90.678) 150.749,86.741 152.273,85.217 C10.2@152.273,67.567 C9.2@156.337,67.567 ; T1.4@154.051,107.243 T1.4@155.647,108.839
  Top Layer w2: v1(154.051,103.632) T1.4@154.051,107.243 ; U2.5@154.813,122.047 155.647,121.213 T1.4@155.647,108.839
  Bottom Layer w1: v1(150.749,90.678) 150.749,91.313 152.019,92.583 152.019,101.346 154.051,103.378 v1(154.051,103.632)
  Bottom Layer w2: U2.7@152.273,122.047 U2.5@154.813,122.047 U2.3@157.353,122.047 U2.1@159.893,122.047
VCC_SIRENE: P1.5 T3.4 | length 12.6
  Top Layer w2: P1.5@28.321,82.931 29.337,82.931 34.417,88.011 T3.4@36.631,88.011 ; T3.4@35.052,87.956 T3.4@36.631,89.535
VCC_UTR2: C13.1 T2.4 U3.11 | length 50.5
  Top Layer w1: T2.4@36.631,80.391 36.631,73.605 42.545,67.691 59.309,67.691 61.341,65.659 U3.11@61.341,55.753
  Bottom Layer w1.2: C13.1@59.309,60.703 61.341,58.671 U3.11@61.341,55.753
VCC_VOITURE: D1.1 P2.2 P2.3 R10.1 | length 26.8
  Top Layer w0.5: D1.1@35.941,109.393 40.432,104.902 45.974,104.902 47.117,103.759 R10.1@47.117,101.153
  Top Layer w2: P2.2@28.321,105.791 P2.3@28.321,108.331 D1.1@34.925,108.331 ; D1.1@34.879,108.331 D1.1@35.941,109.393
pads on no net: U0.5 U1.23 U1.24 U2.8 U2.9 U2.10 U2.11 U2.12 U2.13 U2.14 U2.15 U2.16 U2.18 U2.19 U2.22 U2.24 U2.25 U2.26 U2.27 U2.28 U2.29 U2.30 U2.31 U2.32 U2.33 U2.34 U2.36 U2.38 U2.40 U2.42 U2.43 U2.44 U2.46 U2.47 U2.48 U2.49 U3.6 U3.9 U3.10 U3.12
copper on no net: | length 808.1
  Top Layer w0.254: 22.86,53.975 23.368,52.451 ; 22.86,124.841 23.368,126.365 ; 23.114,52.451 23.622,52.451 ; 23.114,126.365 23.622,126.365 ; 23.368,81.511 23.368,52.451 ; 23.368,97.305 23.368,126.365 ; 23.876,53.975 23.368,52.451 ; 23.876,124.841 23.368,126.365 ; 25.527,24.13 25.527,24.638 ; 27.051,23.876 25.527,24.384 ; 27.051,24.892 25.527,24.384 ; 88.941,24.384 25.527,24.384 ; 106.004,24.384 169.418,24.384 ; 167.894,23.876 169.418,24.384 ; 167.894,24.892 169.418,24.384 ; 169.418,24.13 169.418,24.638
  Top Layer w0.4: 152.019,126.365 26.035,126.365 26.035,52.578 111.125,52.578 111.76,52.578 169.672,52.578 169.672,126.365 152.146,126.365 ; 153.122,56.388 150.622,56.388 153.022,58.788 153.683,58.788 153.924,58.547 153.924,57.99 153.722,57.788 153.222,57.788 153.022,57.988 153.022,58.547 153.276,58.801 154.809,58.801 155.322,58.288 155.322,57.388 154.222,56.288 154.222,54.488 155.022,53.688 158.058,53.688 158.958,54.588 158.958,55.388 158.458,55.888 158.458,57.241 158.705,57.488 159.258,57.488 159.51,57.236 159.51,56.54 159.258,56.288 155.322,56.288 156.172,55.438 155.422,54.688 157.822,54.688 ; 111.76,26.67 111.76,52.07 155.575,52.07 155.575,26.67 111.76,26.67

## Other copper
Top Layer:
  text "73.914 (mm)" at 24.282,81.765 h1.52 r90
  text "www.lebomb.fr" at 120.65,57.912 h1.52
  text "Alarme Voiture V2" at 74.93,55.88 h1.52
  text "by LeBomb" at 117.221,54.102 h3
  text "Car Tracker GPS/GSM" at 74.549,53.467 h1.52
  text "143.891 (mm)" at 89.195,23.47 h1.52

## Text inside footprints (layer, text, board x,y; h text height)
T1: Top Overlay "3" at 149.225,103.251 h1.5; Top Overlay "2" at 159.766,108.585 h1.5; Top Overlay "1" at 149.479,112.903 h1.5
T2: Top Overlay "3" at 36.441,84.566 h1.5 r180; Top Overlay "2" at 38.981,84.566 h1.5 r180; Top Overlay "1" at 41.271,84.566 h1.5 r180
T4: Bottom Overlay "3" at 38.981,117.872 h1.5; Bottom Overlay "2" at 41.521,117.872 h1.5; Bottom Overlay "1" at 43.811,117.872 h1.5